# Altium PCB roneMotorBoard-v9.PcbDoc (part 2 of 2)
Units mil, origin at the board's own origin, x right, y up, seen from the top; angles counter-clockwise.
Board outline 3702 x 3936.38 mil, 2 copper layers (Top Layer, Bottom Layer); 104 components, 83 nets, 397 pads, 285 vias.
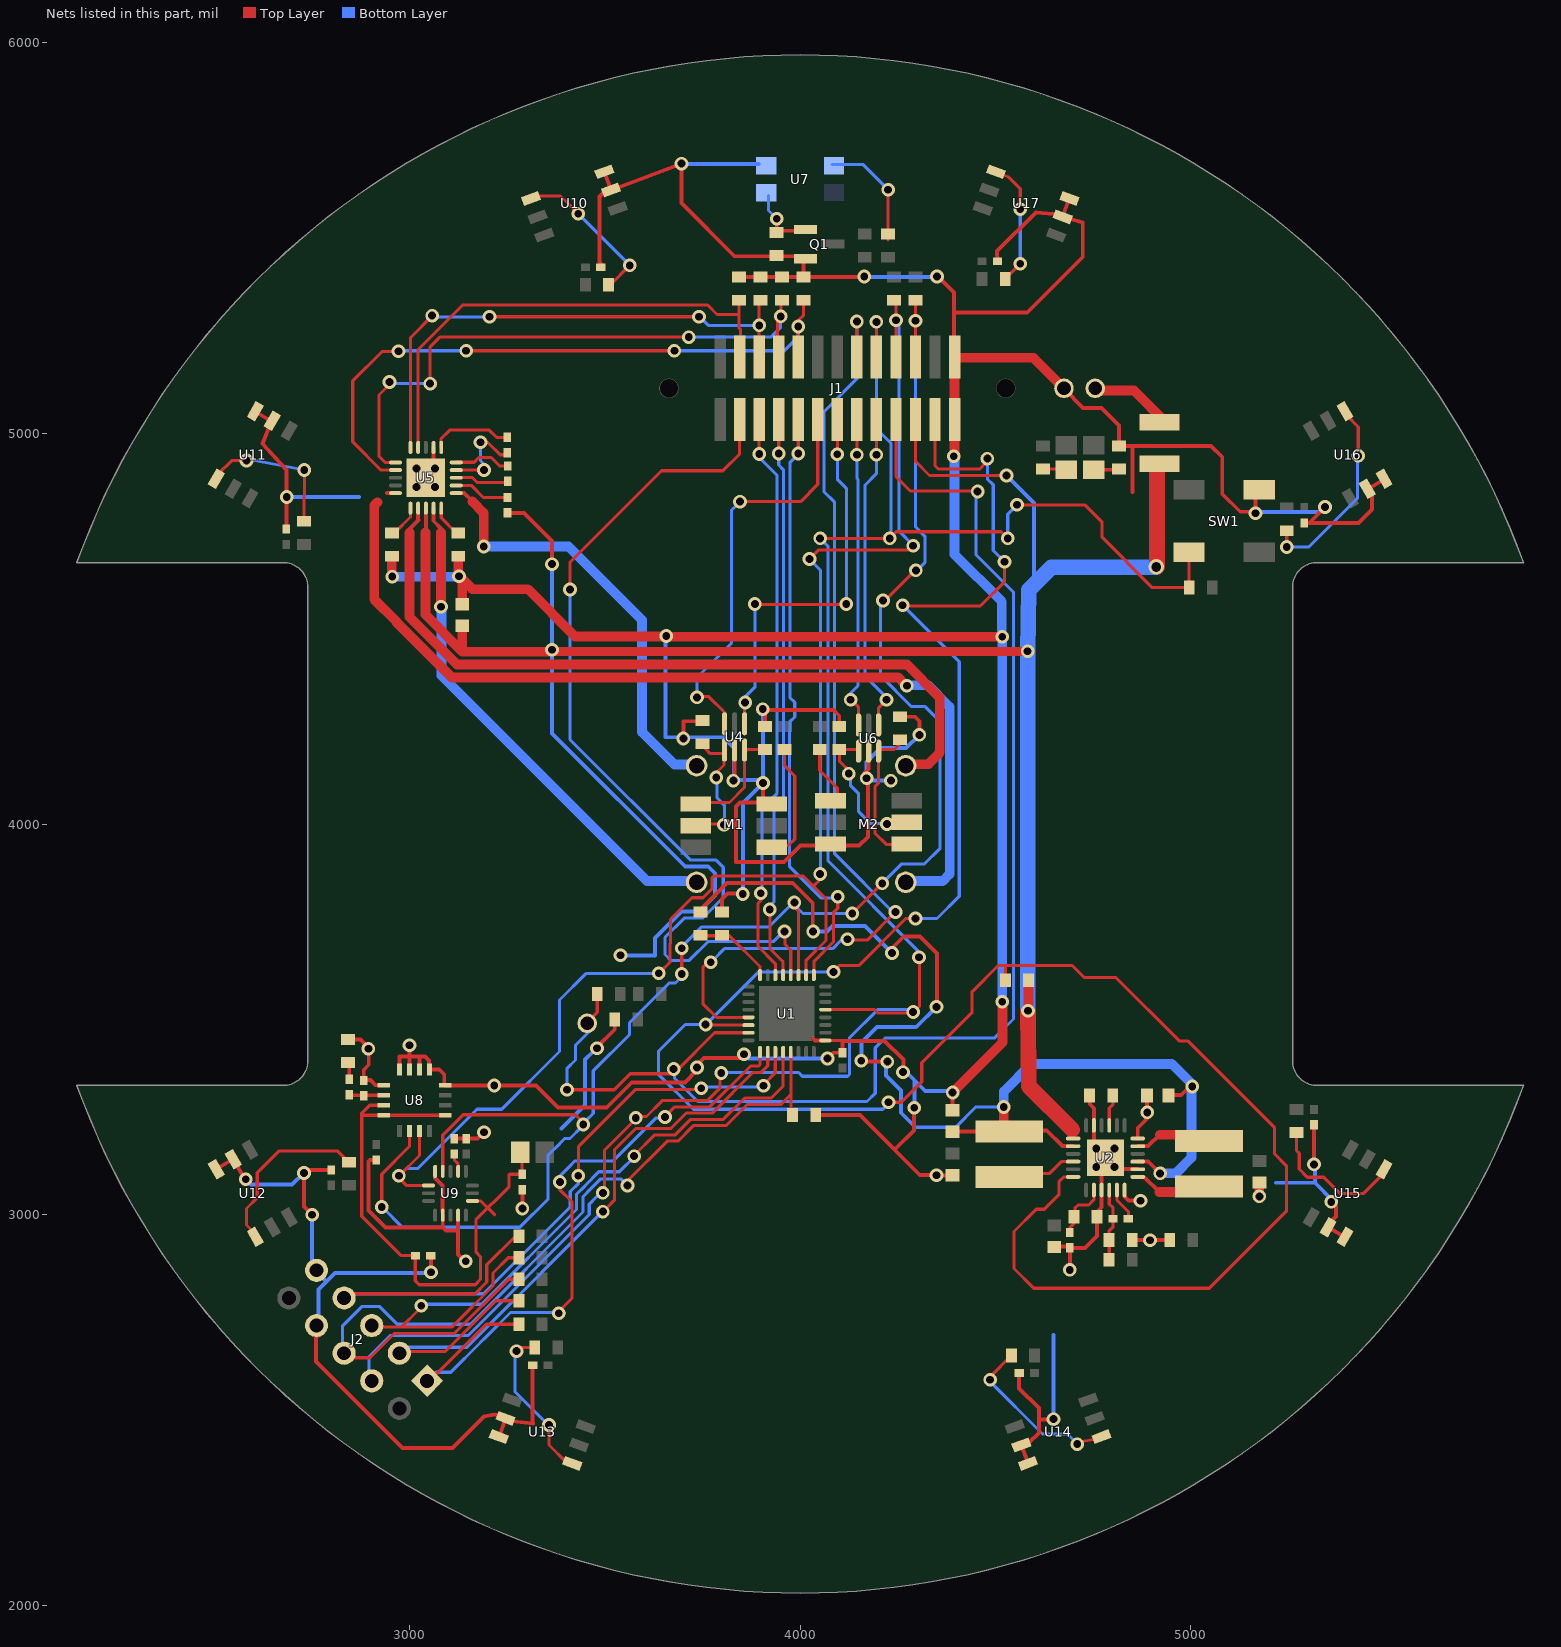
[diagram p2: the nets of this part, all layers, seen from the top]

## Via types
v1: diameter 35, hole 20, Top Layer to Bottom Layer, 252 vias
v2: diameter 25.98, hole 12.99, Top Layer to Bottom Layer, tented top, 9 vias
v3: diameter 35, hole 20, Top Layer to Bottom Layer, tented top, 8 vias
v4: diameter 89, hole 89, Top Layer to Bottom Layer, 8 vias
v5: diameter 140, hole 120, Top Layer to Bottom Layer, 4 vias
v6: diameter 175, hole 175, Top Layer to Bottom Layer, 2 vias
v7: diameter 40, hole 25, Top Layer to Bottom Layer, 1 vias
v8: diameter 915, hole 915, Top Layer to Bottom Layer, 1 vias

## Nets (pads, with @x,y where several pads share a name; then routed paths per layer and width w, separated by ;. In a path a pad name is that pad's centre, name@x,y a point inside that pad or via, vN(x,y) a via of type N, cw(c..) or ccw(c..) an arc to the next point about the centre after c; other vN are vias at no path point) (continued)
GND: C1.1 C2.1 C3.1 C4.1 C5.2 C6.2 C7.1 C13.1 C14.2 C16.1 C17.1 C18.1 C19.1 C20.1 C21.1 C22.1 C23.1 C24.1 C25.1 C26.1 C27.1 C28.1 J1.25 J1.26 J2.8 J2.9 J3.2 M1.K M2.K Q1.2 R10.1 R11.2 R13.1 R16.2 R17.1 R19.1 R20.2 R22.1 R23.1 R24.2 R25.2 R26.2 R27.2 R28.2 R29.2 R31.1 R34.2 R35.1 R44.1 R48.1 SW1.2 U1.1 U2.3 U2.6 U2.8 U2.12 U2.17 U2.25 U4.2 U5.2 U5.21 U6.2 U7.4 U8.8 U8.9 U8.10 U8.11 U8.12 U8.13 U9.5 U9.10 U9.12 U10.5 U10.6 U11.5 U11.6 U12.5 U12.6 U13.5 U13.6 U14.5 U14.6 U15.5 U15.6 U16.5 U16.6 U17.5 U17.6 | length 19313.7
  Top Layer w8: U1.1@4067.94,3446 4107,3446
  Top Layer w10: U12.6@2505.7,3116.6 2548.38,3142.62 U12.5@2549,3143 ; U12.5@2549,3141.6 2576,3096 v1(2581,3091) ; U11.6@2606,5055 U11.5@2647.91,5030.05 ; U11.5@2643.91,5023.05 2644,5023 2624,4973 2685,4906 v1@2685,4836 ; C20.1@2685,4754.69 v1@2685,4836 ; v1(2686,4837) v1@2685,4836 ; v1(2751,3000) 2730,3021 v1(2730,3107) 2738,3115 C21.1@2800,3115 ; J2.8@2767.16,2691.42 2761,2685.26 2761,2624 2982,2403 3110,2403 3191,2484 3217,2489 U13.5@3243,2483 ; R35.1@2843,3448.53 2874.47,3448.53 2885,3438 v1@2885,3425 ; C14.2@2883,3343.69 2883,3371 2896,3384 v1@2896,3423 ; C14.2@2883,3345 2900,3345 2913.61,3331.39 U8.13@2934.26,3331.39 ; v1@2883,3423 v1@2885,3425 ; v1(2895,3425) v1@2885,3425 ; C17.1@2915,3140.32 2898.68,3140.32 2895,3136.63 2895,3010.87 2938.87,2967 3085,2967 ; U8.12@2974.61,3371.74 2974.61,3405 3000.2,3405 ; U8.11@3000.2,3371.74 3000.2,3405 ; v1@3000.2,3425.2 3000.2,3405 ; U8.10@3025.8,3371.74 3025.8,3404.2 ; U8.9@3050,3370 3050,3395 3040,3405 3000.2,3405 ; U8.9@3051.39,3371.74 3076.26,3371.74 3089,3359 U8.8@3089,3331 ; v1@3055,2850 v1(3055,2853) C18.1@3055,2895 ; U5.21@3062,4906 U5.2@3062,4964.07 ; U9.5@3065.63,3111.1 3065.63,3094.37 3085,3075 U9.10@3085,3008 ; 3085.32,2968.68 U9.10@3085.32,2998.9 ; 3086,2968 3094,2960 3124.69,2960 ; U8.8@3091.35,3331 v1(3217,3331) 3304,3331 ; C28.1@3116,3194.68 C27.1@3145,3194.68 3174.68,3194.68 v1(3191,3211) ; U9.12@3124.69,2998.9 3124.69,2960 ; 3125,2960 3124.69,2960 ; v1@3139.67,2885.33 v1(3144,2881) v1@3145,2880 ; v1@3145,2878 3124.69,2898.31 3124.69,2960 ; U13.6@3231,2434 U13.5@3246.03,2479.2 ; U13.5@3251,2473 3316,2466 ; v1(3289,3016) C16.1@3289,3064.32 ; 3305,3331 3324,3331 3380,3275 3505,3275 3569,3339 3705,3339 v1@3736,3370 ; C22.1@3315.32,2615 3315.32,2467.68 3316,2467 ; v1@3477.5,3426.5 3525.47,3474.47 R44.1@3525.47,3500 ; C19.1@3496,5423 3496,5428 3486,5438 3486,5606 3502.2,5622.2 U10.5@3515.97,5622.2 ; U10.6@3498.87,5669.19 U10.5@3516,5623 ; U10.5@3526,5626 v1(3696,5690) 3696,5589 3832,5453 R34.2@3940,5453 ; v1(3701,4219) 3701,4263 R22.1@3745.47,4263 ; v1@3730.68,3364.48 3730.68,3378.68 3753.5,3401.5 v1@3846.5,3401.5 ; R19.1@3800,3774.53 3800,3808 3814,3822 v1@3851,3822 ; v1@3832,4127 U4.2@3832,4189.54 ; R25.2@3843.53,5399.53 R26.2@3898,5399.53 R27.2@3953,5399.53 R24.2@4008,5399.53 Q1.2@4008,5441 ; M1.K@3905,4055 M1.K@3905,4055.12 ; v1(3905,4105) M1.K@3905,4055.12 ; M1.K@3905.16,4055.12 M1.K@3905,4055.12 ; R20.2@3910,4250 v1@3910,4290 ; v1@3913.5,4292 4085,4292 4100,4277 R31.1@4100,4249.53 ; R34.2@3939,5454.47 3940.47,5453 3987,5453 Q1.2@3996,5444 ; R24.2@4008,5399.53 v1@4174.5,5399.5 ; 4033.12,3450.88 4037.9,3446.1 U1.1@4064.43,3446.1 ; R48.1@4039.53,3255 4152.96,3255 4181.96,3226 ; v1(4070,3400) 4084.68,3414.68 C1.1@4108,3414.68 4108,3444 ; M2.K@4094.84,3944.88 4150.88,3944.88 4173,3967 4173,4122 4165,4130 4175,4140 U6.2@4175,4186.54 ; M2.K@4096,3945 4000.87,3945 3958.87,3903 3836,3903 3836,4045 3846.12,4055.12 M1.K@3905,4055.12 ; 4107,3445 4108,3444 ; 4182,3226 4306,3102 v1@4348,3102 ; 4244,3169 4291,3216 v1@4291,3278 ; R23.1@4255,4274.53 4293.47,4274.53 4305,4263 v1(4305,4228) v1@4305,4226 ; v1@4266,3371 4264,3373 4264,3397 4216,3445 4108,3445 4108,3444 ; v1@4347,3101 v1(4349,3101) 4390,3101 C3.1@4390,3101.44 ; v1@4350,5404 4394,5360 4394,5309 ; C2.1@4390,3267.56 v1(4390,3313) ; J1.26@4394,5235 4394,5309 ; C26.1@4504.69,5440 4504,5466 4603,5565 U17.5@4663,5560 ; C23.1@4560.31,2595 4560.31,2555.68 4611,2505 4611,2476 ; U14.5@4566.03,2410.8 4580.47,2371.44 4581,2370 U14.6@4580,2368 ; U14.5@4573,2417 4586,2417 4611,2442 4611,2476 ; C6.2@4640,2918.44 C4.1@4690,2918.44 ; v1(4648,2477) 4647,2476 4611,2476 ; J3.2@4675,5114 4724,5065 4771,5065 4816,5020 R17.1@4816,4967.53 5051.47,4967.53 5080,4939 5080,4845 5126,4799 v1@5165,4799 ; U17.6@4687,5599 U17.5@4671.97,5553.8 4723,5539 4723,5451 4581,5309 4394,5309 ; v1@4690,2862 C4.1@4690,2915.32 ; C4.1@4690,2917.6 C4.1@4690,2915.32 ; R11.2@4741,3292 4741,3283 4751.47,3272.53 U2.17@4751.47,3228.68 ; U2.17@4751.47,3228.83 4751.47,3175.69 U2.25@4781,3146.16 ; R10.1@4759,3007 4771.16,3019.16 U2.3@4771.16,3063.32 ; R10.1@4760,2988 4760,2946 4729.31,2915.32 C4.1@4690,2915.32 ; U2.3@4771.16,3063.48 4771.16,3136.32 U2.25@4781,3146.16 ; U2.25@4810.53,3107.47 U2.25@4810.53,3116.63 ; U2.6@4830.21,3046.79 4840.21,3036.79 v1@4871,3036.79 ; R16.2@4849.53,2935 4889,2935 v1(4895,2935) R13.1@4945.47,2935 ; 4850,4849 4850,4967 ; U2.8@4863.68,3116.63 U2.25@4810.53,3116.63 ; U2.12@4863.68,3195.37 4863.68,3221.68 4888,3246 v1@4884,3250 ; v1@4887.44,3261.56 C5.2@4887.44,3315 ; v1(5165,4795) v1@5165,4799 ; SW1.2@5165,4846 v1@5165,4799 ; v1@5166,4799 v1@5165,4799 ; C25.1@5289,4771 5303,4771 v1(5343,4811) ; C25.1@5290,4770.31 5428.31,4770.31 5463,4805 5463,4847 U16.5@5460,4850 ; v1(5315,3129) C24.1@5315,3230.32 ; U15.5@5351,2968.4 U15.6@5394,2943 ; U15.5@5358,2983 5371,2996 5371,3021 v1@5362.5,3029.5 ; v1(5359,3033) v1@5362.5,3029.5 ; v1@5362,3029 v1@5362.5,3029.5 ; v1@5363,3030 v1@5362.5,3029.5 ; U16.5@5454,4858 U16.6@5493,4881 ; U2.25@4781,3146.16 U2.25@4810.53,3116.63
  Top Layer w25: v1@2955,4634 R28.2@2955,4685.47 ; v1@3125,4637 R29.2@3125,4685.47 ; v1@3127.5,4634.5 3161,4601 3303,4601 3424,4480 3657,4479.79 v1(4517,4479) ; C13.1@3135,4562.56 v1@3135,4625 ; v1(4390,3313) 4518,3441 v1@4518,3543 ; v1@4395,4942 J1.25@4395,5034.98 J1.26@4395,5195.02 ; J1.26@4397,5193 4597,5193 J3.2@4675,5115 ; v1(5175,3047) C7.1@5175,3082.44
  Bottom Layer w10: v1(2581,3091) 2595,3077 2700,3077 v1(2730,3107) ; v1(2686,4837) 2871,4837 ; v1(2751,3000) 2751,2866 2785,2832 ; J2.8@2767.16,2718 2767.16,2809.16 2809,2851 v1@3057,2851 ; v1@3135,2875 v1@3139,2875 ; v1@3139,2869 v1@3139,2875 ; v1@3141,2880 3145,2880 3140,2875 v1@3139,2875 ; v1@3143,2879 v1@3139,2875 ; 3389,3221 3449,3281 3449,3397 v1@3469,3417 ; v1@3655.47,4480.47 3655.47,4222 3803,4222 3830,4195 v1@3830,4113 ; v1@3698,5689 U7.4@3894,5689 ; v1@3837,4113 3892,4113 v1@3902.5,4102.5 ; v1@3854,3812 3854,4054 v1@3902.5,4102.5 ; v1@3869,3400 v1(4070,3400) ; v1@3905,4287 v1(3905,4105) v1@3902.5,4102.5 ; v1@4165,5400 v1@4353,5400 ; v1@4170,4119 4170,4159 4205,4194 4271,4194 v1(4305,4228) ; v1@4172,4127 4188,4111 4228,4111 v1@4232,4115 ; v1@4252.5,3372.5 4264.5,3372.5 4320,3317 v1@4381,3317 ; v1(4292,3274) 4292,3343 ; v1(4648,2477) 4648,2692 ; v1@5163,4798 5330,4798 v1(5343,4811) ; 5217,3082 5317,3082 ; v1@5317,3128 5317,3082 ; v1@5362.5,3036.5 5317,3082
  Bottom Layer w25: v1(2956,4633) v1@3127,4633 ; v1@4395,4929 4395,4690 4516,4569 v1@4516,4496 ; v1@4517,3553 v1(4517,4479) v1@4517,4483
  other v1: 4690,2859 4871,3036 4888,3262 4263,3365 3736,3377 3856,3411 3480,3426 3000,3434 4517,3545 3853,3821 3829,4111 4232,4111 4170,4117 3904,4294 3657,4481 3127,4634 4393,4941 4164,5401 4350,5401
  other v3: 4757.38,3122.38 4804.62,3122.38 4757.38,3169.62 4804.62,3169.62 3018.38,4862.38 3065.62,4862.38 3018.38,4909.62 3065.62,4909.62
I2C_SCL: J1.22 R1.1 U1.11 U8.2 U9.4 | length 4565.7
  Top Layer w8: v1@2929,3034 2929,3104 3000.2,3175.2 U8.2@3000.2,3214.26 ; U9.4@3085.32,3111.1 3085.32,3203.62 3137.69,3256 3425,3256 v1@3449,3232 ; v1@3697,3619 v1@3697,3673 ; v1@3976,3796 3995.53,3776.47 U1.11@3995.53,3613.43 ; v1(4133,3771) v1(4210,3848) ; v1@4220,4575 v1@4292,4647 ; v1@4288,4648 v1@4298,4648 ; J1.22@4295,5195.02 v1(4295,5288) v1@4295,5293 ; R1.1@4295,5336 v1@4295,5293 ; v1@4308,5293 v1@4295,5293
  Bottom Layer w8: v1@2931,3019 2982,2968 3282.72,2968 3355,3040.28 3355,3153 3371.22,3169.22 3371.5,3169.22 3397.28,3195 3411,3195 3440.87,3224.87 3447.87,3224.87 v1@3453.64,3230.64 ; v1@3450,3239 3470.31,3259.31 3470.31,3368.31 3563,3461 3563,3467 ; 3563,3468.08 3563,3491 3665,3593 3681,3593 v1@3699,3611 ; v1@3692,3681 3747,3736 3919,3736 v1@3979.5,3796.5 ; v1@3981,3797 4007,3771 v1(4133,3771) ; v1@4205,4559 4205,4380.28 4284.95,4300.33 4319.67,4300.33 4358,4262 4358,3938 4318,3898 4260,3898 v1(4210,3848) ; v1(4295,5288) 4295,4760.5 4319,4736.5 4319,4669 v1@4298,4648
  other v1: 2929,3020 3445,3231 3697,3616 3697,3682 3985,3799 4212,4572 4296,4649
I2C_SDA: J1.20 R2.1 U1.10 U8.3 U9.6 | length 3868.5
  Top Layer w8: v1@2972,3096 2993.31,3074.69 U9.6@3048.9,3074.69 ; v1@2973.5,3099.5 3025.8,3151.8 U8.3@3025.8,3214.26 ; v1@3636,3619 3639,3619 3667,3647 3667,3693.96 3668,3694.96 3668,3756 3723.23,3811.23 3751.24,3811.23 3774.41,3834.4 3774.41,3862.41 3779,3867 4008,3867 4066,3809 4066,3702 4015.21,3651.21 U1.10@4015.21,3613.43 ; v1(4024,4678) 4047.5,4701.5 v1@4278.5,4701.5 ; 4035,3842 v1@4047.94,3854.94 ; J1.20@4245,5195.02 v1(4245,5289) R2.1@4245,5338
  Bottom Layer w8: v1(2973,3100) 2991.5,3118.5 3021.5,3118.5 3173,3270 3236,3270 3384,3418 3384,3549.63 3451.37,3617 v1@3638,3617 ; v1(4024,4678) 4024,4677 4052,4649 4052,3885.44 v1@4043,3876.44 ; v1@4244,5288 4253,5279 4253,4748.72 4289,4712.72 v1(4289,4712)
  other v1: 3638,3618 4051,3872
JTAG_BOTTOM_TCK: J2.1 R8.1 U1.25 | length 1800.5
  Top Layer w8: J2.1@3042,2565 3197,2720 R8.1@3280.47,2720 ; v1@3385,3085 v1(3385,3084) 3385,3064 3416,3033 3416,2786 3388,2758 v1@3397,2749 ; v1@3653,3250 3653.12,3250 3679.12,3276 3768.37,3276 3872.75,3380.37 3893.37,3380.37 3897.1,3384.1 U1.25@3897.1,3416.57
  Bottom Layer w8: J2.1@3039,2567 J2.1@3074,2567 ; J2.1@3047,2576 3068,2597 3105.63,2597 3180.5,2671.87 3180.5,2672.22 3197.78,2689.5 3198.13,2689.5 3258.63,2750 3389,2750 3390,2749 v1@3397,2749 ; v1@3384.5,3085.5 3384.5,3098.5 3415,3129 ; 3413.22,3127.5 3423.72,3138 3521.28,3138 3631.28,3248 v1@3650,3248 ; v1@3654,3249 v1(3654,3250)
  other v1: 3382,2748
JTAG_BOTTOM_TDI: J2.7 R6.1 U1.27 | length 2000.3
  Top Layer w8: J2.7@2831,2778 2851,2798 3168,2798 3198,2828 3198,2872 R6.1@3273,2947 ; v1@3441,3107 3433,3115 3433,3175 3579,3321 3748,3321 v1@3753,3326 ; v1@3909,3336 3936.24,3363.01 U1.27@3936.47,3416.57
  Bottom Layer w8: J2.7@2826,2774 2850,2798 3189.49,2798 3411.5,3020.01 3411.5,3059.5 3433,3081 3433,3087 v1@3427,3093 ; v1@3758,3327 v1@3903,3327
  other v1: 3432,3100 3747,3324 3906,3330
JTAG_BOTTOM_TDO: J2.5 R5.1 U1.28 | length 1819.5
  Top Layer w8: J2.5@2905,2713 3109.25,2713 3214,2817.75 3214,2851 3253,2890 R5.1@3280.47,2890 ; 2980.5,2713.5 3022,2755 3022,2774 v1@3034,2774 ; v1@3574.5,3151.5 3627.5,3204.5 3680.5,3204.5 3720,3244 3803.37,3244 3858.37,3299 3926,3299 3956,3329 U1.28@3956,3413
  Bottom Layer w8: v1@3034,2774 3037,2771 3185.12,2771 3427.5,3013.38 3427.5,3052.5 3449.5,3074.5 3449.5,3074.85 3484.65,3110 3537,3110 3575,3148 v1@3575,3149
  other v1: 3030,2767 3575,3150
JTAG_BOTTOM_TEST: J2.6 R7.1 R48.2 U1.29 | length 2219.7
  Top Layer w8: J2.6@2829,2634 2899,2634 2961,2696 3114.88,2696 3253.88,2835 R7.1@3280.47,2835 ; v1@3558,3087 3659.5,3188.5 3687.13,3188.5 3726.63,3228 3810,3228 3864,3282 3951,3282 ; 3951.17,3282.83 3976,3307.65 ; R48.2@3976,3258 3976,3307.65 ; U1.29@3976,3412 3976,3307.65
  Bottom Layer w8: J2.6@2829,2645.71 2829,2716 2878,2765 2924,2765 2969,2720 3156.75,2720 3444,3007.25 3444,3046.37 3465.5,3067.87 ; 3465.5,3068.22 3489.28,3092 3541,3092 v1(3558,3075)
JTAG_BOTTOM_TMS: J2.3 R4.1 U1.26 | length 1718.3
  Top Layer w8: J2.3@2985,2648 2987,2650 3091.51,2650 3221.51,2780 R4.1@3280.47,2780 ; v1@3499.5,3011.5 3499.5,3017.5 3504.5,3017.5 3525,3038 3525,3167 3578.5,3220.5 3668.13,3220.5 3707.63,3260 3775,3260 3879.37,3364.37 3900,3364.37 3916.79,3381.16 U1.26@3916.79,3416.57
  Bottom Layer w8: J2.3@2969,2632 2998,2661 3147,2661 3164.5,2678.5 3164.5,2678.85 3191.15,2705.5 3191.5,2705.5 3339.5,2853.5 3339.5,2854.13 3488.37,3003 v1@3498,3003
  other v1: 3495,3008
LED_IR_BEACON: J1.16 U1.21 | length 2498.6
  Top Layer w8: v1@3769,3641 3759,3641 3751,3633 3751,3540 3786,3505 U1.21@3865,3505 ; v1@4108.5,3703.5 4172.5,3703.5 v1(4244,3775) ; J1.16@4145,5195.02 v1(4145,5286)
  Bottom Layer w8: v1@3778,3642 3778,3653 3806,3681 4083,3681 4104,3702 v1@4122,3702 ; v1(4145,5286) 4145,5139 4061,5055 4061,4850 4088,4823 4088,3924 v1@4241,3771
  other v1: 3771,3646 4121,3705
MOT0_CUR: R29.1 U5.15 | length 77.7
  Top Layer w8: U5.15@3081.37,4808.24 3081.37,4783.37 R29.1@3118.74,4746
MOT0_PWMA: J1.4 R25.1 U5.4 | length 1255.7
  Top Layer w8: U5.4@3022.32,4963.76 3022.32,5214.31 3136,5328 3763,5328 3787,5304 3843,5304 ; R25.1@3840,5338 3843,5335 3843,5304 ; J1.4@3842,5202.26 ccw(c3852.24,5202.26) J1.4@3845,5195.02 ; J1.4@3847,5243 3847,5266 3843,5270 3843,5304 ; J1.4@3843,5199.85 ccw(c3849.83,5199.85) J1.4@3845,5195.02 ; J1.4@3843,5199.85 ccw(c3849.83,5199.85) J1.4@3845,5195.02 ; J1.4@3843,5199.85 ccw(c3849.83,5199.85) J1.4@3845,5195.02 ; J1.4@3843,5199.85 ccw(c3849.83,5199.85) J1.4@3845,5195.02
MOT0_PWMB: J1.6 R26.1 U5.5 | length 1351.9
  Top Layer w8: U5.5@3002.63,4963.76 3002.63,5022.37 ; 3003,5022 3003,5218 3003,5245 v1@3060,5302 ; v1(3205,5298) v1(3741,5298) ; J1.6@3895,5195.02 v1(3895,5276) R26.1@3895,5339
  Bottom Layer w8: v1@3061,5297 3204,5297 v1(3205,5298) ; v1(3741,5298) 3743,5298 3765,5276 v1(3895,5276) v1@3893.5,5274.5
  other v1: 3058,5301
MOT1_A: M2.M2 U5.10 | length 2382.2
  Top Layer w10: 2941.94,4846.94 U5.10@2963.56,4846.94
  Top Layer w25: 2918.5,4823.5 2910,4815 2910,4575 2967,4518 ; 2967,4516.33 3108.33,4375 4251,4375 v1@4266,4360
  Bottom Layer w25: v1@4275,4355 4327,4355 4382.5,4299.5 4382.5,3871.5 4365,3854 M2.M2@4284,3854
  other v1: 4273,4354
MOT1_B: M2.M1 U5.12 | length 1965.1
  Top Layer w10: 3001,4746 3001,4756 3022.97,4777.98 ; 3022,4778 U5.12@3022,4807.24
  Top Layer w25: 3001,4746 3000,4745 3000,4530 3122,4408 4273,4408 4357,4324 4357,4184 4355,4182 4355,4180 4328,4153 M2.M1@4275,4153
MOT1_CUR: R28.1 U5.11 | length 78.8
  Top Layer w8: R28.1@2965.03,4745 2965.03,4748.03 3002.63,4785.63 U5.11@3002.63,4808.24
MOT1_PWMA: J1.8 R27.1 U5.6 | length 1520.2
  Top Layer w8: v1@2945,5121 2922,5098 2922,4941 2937.63,4925.37 U5.6@2964.24,4925.37 ; v1(3053,5127) 3053,5221 3078,5246 v1(3715,5246) ; v1@3942,5289 3942,5198.02 ccw(c3945,5198.02) J1.8@3945,5195.02 cw(c3945,5197.02) J1.8@3943,5197.02 ; v1(3950,5299) 3951,5298 R27.1@3951,5341
  Bottom Layer w8: v1@2954,5127 v1(3053,5127) ; v1(3715,5246) 3925,5246 3950,5271 v1(3950,5299)
  other v1: 2949,5131
MOT1_PWMB: J1.10 R24.1 U5.7 | length 1631.8
  Top Layer w8: U5.7@2964.24,4905.69 2927.32,4905.69 2855,4978 2855,5134 2930,5209 v1@2975,5209 ; v1(3145,5211) v1(3678,5211) ; J1.10@3995,5195.02 v1@3995,5263 ; v1(3995,5273) v1@4005,5273 ; 3998,5291 4008,5301 R24.1@4008,5340.47
  Bottom Layer w8: v1@2982,5211 v1(3145,5211) ; v1(3678,5211) 3959,5211 3995,5247 v1(3995,5273)
  other v1: 2972,5210
MOT_0A: M1.M2 U5.16 | length 1121.7
  Top Layer w10: U5.16@3119.07,4846.94 3140.06,4846.94 3161,4826
  Top Layer w25: 3161,4826 3161,4825 3190,4796 v1(3190,4710)
  Bottom Layer w25: v1(3190,4710) 3406.74,4710 3595,4521.74 3595,4235 3678,4152 M1.M2@3734,4152
MOT_0B: M1.M1 U5.14 | length 1269.9
  Top Layer w10: 3061,4776 3081,4756 ; 3062,4776 U5.14@3062,4808.56
  Top Layer w25: v1(3081,4556) 3081,4746
  Bottom Layer w25: v1@3082,4557 3082,4380 3608,3854 3706.19,3854
NetC4_2: C4.2 R10.2 U2.2 | length 143.4
  Top Layer w8: C4.2@4690,2954.69 4690,2967 4700,2977 R10.2@4700,2994 ; R10.2@4700.47,2995 R10.2@4701.17,2995 ; R10.2@4703,3000 4703,3017 4711,3025 4738,3025 4751.47,3038.47 U2.2@4751.47,3063.32
NetC8_1: C8.1 R14.2 R16.1 U2.4 | length 205.2
  Top Layer w8: R16.1@4790,2941 4790,2958 4800,2968 4800,3019 4791,3027 U2.4@4791,3056 ; U2.4@4790.84,3063.48 4791,3063.32 U2.4@4791,3048.99 ; R14.2@4791,2871 4791,2937 R16.1@4792,2938
NetC8_2: C8.2 U2.5 | length 80.5
  Top Layer w8: U2.5@4810.53,3063.32 4810.53,3037.47 4840,3008 C8.2@4840,2995
NetC10_1: C10.1 U5.19 | length 230.2
  Top Layer w8: U5.19@3119.07,4906 v1(3191,4906) ; v1(3182,4977) 3201,4976 3232,4945 3251.69,4945 C10.1@3253,4946.31
  Bottom Layer w8: v1@3184,4913 v1(3191,4906) ; v1@3184,4975 v1(3182,4977) 3182,4930 v1@3192,4920
NetC10_2: C10.2 U5.1 | length 211.4
  Top Layer w8: U5.1@3080.68,4964.07 3080.68,4985.68 3103,5008 3204.25,5008 3223.25,4989 3248.69,4989 C10.2@3252,4985.69
NetC11_1: C11.1 U5.18 | length 138.2
  Top Layer w8: U5.18@3119.07,4886.31 3161.31,4886.31 3173.63,4874 3248.06,4874 C11.1@3251,4876.94
NetC11_2: C11.2 U5.20 | length 146.3
  Top Layer w8: U5.20@3119.07,4925.68 3165.43,4925.68 3177.75,4938 3209,4938 3230.69,4916.31 C11.2@3251.31,4916.31
NetC12_2: C12.2 U5.17 | length 144.7
  Top Layer w8: U5.17@3119.07,4866.63 3158.37,4866.63 3189.31,4835.69 C12.2@3251,4835.69
NetC15_2: C15.2 R35.2 | length 42.3
  Top Layer w8: C15.2@2846,3346.69 R35.2@2846,3389
NetC28_2: C28.2 U9.2 | length 48.9
  Top Layer w8: C28.2@3115,3156 3115,3140 3124.69,3130.31 U9.2@3124.69,3111.1
NetD1_2: D1.2 R12.2 | length 50.5
  Top Layer w8: R12.2@4621,4908.47 D1.2@4671.53,4908.47
NetD2_2: D2.2 R17.2 | length 60.5
  Top Layer w8: D2.2@4751,4906.5 R17.2@4811.5,4906.5
NetJ3_1: J3.1 R9.2 | length 197.5
  Top Layer w25: J3.1@4771,5109 4854.15,5109 R9.2@4935,5028.15
NetL1_1: L1.1 U2.22 | length 188
  Top Layer w8: L1.1@4521,3097.75 4529.25,3106 4638.37,3106 4668.37,3136 U2.22@4693.11,3136
NetL2_1: L2.1 U2.7 | length 211.7
  Top Layer w10: U2.7@4863.68,3096.94 4880.06,3096.94 4919,3058 ; L2.1@5031.09,3058 L2.1@5051,3077.91
  Top Layer w25: 4919,3058 L2.1@5031.09,3058
NetL2_2: L2.2 U2.11 | length 158.2
  Top Layer w10: U2.11@4863.68,3175.53 4890,3175.53 ; 4890,3176 4920.91,3205 ; L2.2@5039.41,3206 L2.2@5051,3194.41
  Top Layer w25: 4920.91,3205 L2.2@4994,3205
NetM1_A: M1.A R21.1 | length 326.9
  Top Layer w8: M1.A@3906,3945 3970,3945 3986,3961 3986,4123 3960,4149 R21.1@3960,4190.47
NetM2_A: M2.A R30.1 | length 155.1
  Top Layer w8: R30.1@4050,4190.47 4050,4137 4095,4092 M2.A@4095,4054
NetQ1_1: Q1.1 R34.1 U7.3 | length 179.7
  Top Layer w8: R34.1@3940,5512 v1(3940,5549) ; R34.1@3940,5518 4010.17,5518 Q1.1@4013.57,5521.4
  Bottom Layer w8: U7.3@3919,5608 3919,5570 v1(3940,5549)
NetR11_1: R11.1 U2.15 | length 83.8
  Top Layer w8: U2.15@4790.84,3228.83 4790.84,3265.84 4790.84,3272.84 4800,3282 4800,3306 R11.1@4802,3308
NetR32_2: R32.2 U7.1 | length 299.4
  Top Layer w8: 4225,5494.53 v1(4225,5623)
  Bottom Layer w8: U7.1@4081,5688 4160,5688 v1(4225,5623)
NetR36_1: R36.1 U10.1 | length 392.3
  Top Layer w8: U10.1@3323,5607 3386.47,5607 v1(3432,5561.47) v1@3426.47,5567 ; R36.1@3514.53,5380 v1(3564,5429.47)
  Bottom Layer w8: v1(3432,5561.47) v1(3564,5429.47)
NetR37_1: R37.1 U11.1 | length 378.9
  Top Layer w8: U11.1@2511,4896 2545,4930 v1(2583,4930) ; R37.1@2726.03,4778.5 R37.1@2730,4774.53 v1(2731,4906)
  Bottom Layer w8: v1@2580,4935 2579,4935 2579.96,4934.82 2583.78,4934.09 v1(2731,4906)
NetR38_1: R38.1 U12.1 | length 443.9
  Top Layer w8: U12.1@2604,2953 2583,2974 2583,3016 2610.5,3043.5 2610.5,3107.5 2666,3163 2816.53,3163 R38.1@2845,3134.53
NetR39_1: R39.1 U13.1 | length 403
  Top Layer w8: v1@3275,2651 3284,2660 R39.1@3320.47,2660 ; R39.1@3320,2660 R39.1@3320.47,2660 ; R39.1@3325,2660 R39.1@3320.47,2660 ; v1(3357,2462) 3357,2411 3401,2367 U13.1@3417,2367
  Bottom Layer w8: v1@3270,2645 3270,2547 v1@3356,2461
  other v1: 3274,2651
NetR40_1: R40.1 U14.1 | length 436.9
  Top Layer w8: v1(4486,2578) 4486,2585.53 R40.1@4540.47,2640 ; v1@4711,2418 U14.1@4770,2427
  Bottom Layer w8: v1@4484,2574 4485,2574 4620,2439 4684,2439 v1@4710,2413
  other v1: 4709,2413
NetR41_1: R41.1 U15.1 | length 371.8
  Top Layer w8: R41.1@5278,3202.47 R41.1@5270,3210.47 5270,3164 5277,3157 5277,3117 5298,3096 5340,3096 5382,3054 5441,3054 5487,3100 U15.1@5487,3109
NetR42_1: R42.1 U16.1 | length 500.8
  Top Layer w8: v1@5245,4710 R42.1@5245,4750.47 ; U16.1@5397,5047 5428,5016 v1(5428,4942)
  Bottom Layer w8: v1(5245,4709) 5301.47,4709 5426,4833.53 5426,4942 v1@5427,4943
NetR43_1: R43.1 U17.1 | length 308
  Top Layer w8: U17.1@4503,5668 4534,5655 4563,5626 v1(4563,5573) ; R43.1@4524.53,5395 v1(4563,5433.47)
  Bottom Layer w8: v1@4563,5447 v1(4563,5573)
PLLFILT: C14.1 C15.1 U8.14 | length 88.3
  Top Layer w8: C15.1@2846,3305.8 U8.14@2934.26,3305.8
POWER_BUTTON: J1.19 R45.1 TP1.1 U1.23 | length 3589
  Top Layer w8: v1@3415,3320 3524,3320 3565,3361 v1@3682,3361 ; TP1.1@3459,3497 3480.47,3518.47 R45.1@3480.47,3565 ; v1@3685,3370 3780.79,3465.79 U1.23@3867.57,3465.79 ; J1.19@4245,5034.98 4245,4889 4282,4852 v1@4452,4852
  Bottom Layer w8: v1@3403,3318 3403,3374 3425,3396 3425,3434 3460,3469 TP1.1@3460,3486 ; v1@3678,3370 3678,3350 3738,3290 4171,3290 4192,3311 4192,3427 4217,3452 4497,3452 4546,3501 4546,4593 4450,4689 v1@4450,4839
  other v1: 3403,3320 3676,3373 4454,4851
POWER_EN: J1.23 R15.1 U1.22 U2.24 | length 6189
  Top Layer w8: v1@3762,3485.47 U1.22@3867.57,3485.47 ; v1(4085,3621.5) 4085,3623 4099.5,3637.5 4149.5,3637.5 4270,3758 v1(4295,3758) ; v1@4221,3285 4227,3285 v1@4227,3287 ; v1@4230,3288 4259,3288 4311,3340 4311,3389 4440,3518 4440,3571 4507,3638 4696,3638 4726.75,3607.25 4807.75,3607.25 4970,3445 4991.37,3445 5214,3222.37 5214,3155.37 5244,3125.37 5244,3008.96 5102.04,2867 ; v1@4262,4558 4461,4558 4523,4620 v1(4523,4671) ; J1.23@4345,5034.98 4345,4917 4354,4908 4459,4908 4479,4928 v1(4479,4935) ; R15.1@4525.47,3600 4525.47,3635.47 ; U2.24@4698.32,3096.79 4674.47,3096.79 4662,3084.31 4662,3051.37 4624.63,3014 4603.63,3014 4547,2957.37 4547,2862.63 4597.63,2812 5047,2812 5102,2867
  Bottom Layer w8: v1@3761,3489 3893.5,3621.5 v1(4085,3621.5) ; v1@3766,3487 v1(3758,3487) 3706,3487 3637,3418 3637,3360 3727,3270 4074,3270 ; 4075,3270 4211,3270 v1@4230,3289 ; v1(4262,4560) 4407,4415 4407,3815 4350,3758 v1(4295,3758) ; v1(4479,4935) 4479,4883 4494,4868 4494,4700 v1(4523,4671)
  other v1: 4226,3288
QEI_0A: J1.11 U4.6 | length 1046
  Top Layer w8: v1@3738,4326 3766,4326 3806.41,4285.59 U4.6@3806.41,4256.46 ; v1(3846,4825) 4001,4825 4045,4869 J1.11@4045,5034.98
  Bottom Layer w8: v1@3736,4322 v1(3736,4324) 3736,4375 3824,4463 3824,4803 v1(3846,4825)
QEI_0A_ANALOG: M1.E1 R22.2 U4.1 | length 344
  Top Layer w8: M1.E1@3708.31,4000 v1@3810,4000 ; R22.2@3755,4195 3770,4180 3805,4180 3805,4151 v1@3779,4125
  Bottom Layer w8: v1@3781,4114 3787,4108 3787,4067 3806,4048 v1@3806,4004
  other v1: 3805,3998 3785,4119
QEI_0B: J1.13 U4.4 | length 1051.3
  Top Layer w8: U4.4@3857.59,4256.46 v1@3857.59,4323.41 ; v1@3895,4562 v1@4129,4562 ; v1(4095,4946) J1.13@4095,5030
  Bottom Layer w8: v1@3857,4306 3857,4323 3884,4350 3884,4556 v1@3889,4561 ; v1(4095,4946) 4095,4882 4118,4859 4118,4573 v1@4129,4562
  other v1: 3859,4311 3884,4563 4118,4563
QEI_0B_ANALOG: M1.E2 R20.1 U4.3 | length 304.7
  Top Layer w8: M1.E2@3710,4055 3819,4055 3857.59,4093.59 U4.3@3857.59,4189.54 ; 3865,4190 3865.47,4190.47 R20.1@3910,4190.47
QEI_1A: J1.15 U6.6 | length 802.7
  Top Layer w8: v1(4129,4318) 4129,4319 4149.41,4298.59 U6.6@4149.41,4253.46 ; v1(4145,4945) J1.15@4145,5030
  Bottom Layer w8: v1(4129,4318) 4129,4319 4121,4327 4148,4354 4148,4882 4145,4885 v1(4145,4945)
QEI_1A_ANALOG: M2.E1 R31.2 U6.1 | length 374.3
  Top Layer w8: R31.2@4100,4190.47 U6.1@4148.53,4190.47 ; R31.2@4101,4188 4101,4160 4129,4132 v1@4129,4128 ; v1(4222,4000) M2.E1@4285,4000
  Bottom Layer w8: v1@4129,4128 4129,4098 4149.41,4077.59 4149.41,4031.59 4180,4001 v1@4223,4001
  other v1: 4124,4129
QEI_1B: J1.17 U6.4 | length 862.4
  Top Layer w8: v1(4195,4945) J1.17@4195,5032 ; U6.4@4200.59,4253.46 4200.59,4297.59 v1(4221,4318) ; v1(4221,4318) 4228,4325 4228,4328 4221,4321 v1(4221,4318)
  Bottom Layer w8: v1(4195,4945) 4195,4896.63 4166,4867.63 4166,4378 4216,4328 v1@4230,4328 ; v1(4221,4318) 4221,4321 v1@4228,4328
QEI_1B_ANALOG: M2.E2 R23.2 U6.3 | length 390.9
  Top Layer w8: 4200,4104 4191,4095 4191,3977 4220,3948 M2.E2@4293,3948 ; U6.3@4200,4190.47 4240.47,4190.47 R23.2@4258,4208 ; 4200.59,4105.59 U6.3@4200.59,4186.54
RESET: J1.18 J2.4 R47.1 SW1.3 U1.5 | length 5417.4
  Top Layer w8: v1@3492,3055 3499,3062 3499,3165 3585.5,3251.5 3606.5,3251.5 3647,3292 3761.75,3292 3795,3325.25 v1@3795,3360 ; v1(4051,4731) v1(4229,4731) ; U1.5@4064.43,3524.84 4190.16,3524.84 4199,3516 v1@4288,3516 ; J1.18@4195,5195.02 v1(4195,5285) ; v1@4233,4736 4245,4748 4514,4748 v1(4531,4731) ; v1@4290,3528 4300,3528 4305,3533 4305,3658 v1(4304,3659) ; v1(4555,4817) 4555,4816 4729,4816 4772.5,4772.5 4772.5,4733.5 4901,4605 R47.1@4995.47,4605 ; R47.1@4995,4607 SW1.3@4995,4695
  Bottom Layer w8: J2.4@2897,2565 2897,2607 ; 2897,2608 2897,2607 ; v1@3491,3056 3491,3047 3480,3047 3460,3027 3460,3000.63 3150.37,2691 2951,2691 2897,2637 2897,2607 ; v1@3794,3364 3996,3364 4005.5,3354.5 4121.5,3354.5 4126,3359 4126,3453 4198,3525 v1@4276,3525 ; v1(4051,4731) 4071,4711 4071,3906 4301,3676 v1@4301,3655 ; v1(4195,5285) 4195,5012 4232,4975 4232,4734 v1(4229,4731) ; v1(4531,4731) 4531,4793 v1(4555,4817)
  other v1: 3495,3056 3579,3248 3798,3363 4289,3519
SPI_CLK: J1.9 U1.9 | length 1552.8
  Top Layer w8: v1(3995,4948) J1.9@3995,5034.98 ; U1.9@4034.9,3613.43 4034.9,3647.9 4085,3698 4085,3773 4096,3784 v1@4096,3811
  Bottom Layer w8: 3973,4236.56 3973,3891 4053,3811 v1@4106,3811 ; 3974,4236.28 3973.5,4236.78 3973.5,4261.22 3986,4273.72 3986,4311.28 3973.5,4323.78 3973.5,4924.5 3995,4946 v1(3995,4948)
  other v1: 4096,3814
SPI_MISO: J1.5 U1.14 | length 1470.3
  Top Layer w8: 3892,3796.81 3892,3687 3936.47,3642.53 U1.14@3936.47,3613.43 U1.14@3936.47,3610 ; 3892,3797 3899,3804 v1(3899,3823) ; v1(3895,4947) J1.5@3895,5034.98
  Bottom Layer w8: v1@3895,4938 3941,4892 3941,4079 3902,4040 v1@3902,3825
SPI_MOSI: J1.7 U1.13 | length 1460.1
  Top Layer w8: v1@3923,3787 3923,3680.25 3952.13,3651.13 ; v1(3945,4948) J1.7@3945,5034.98 ; 3952.63,3650.63 3952.13,3651.13 ; U1.13@3956.16,3610 U1.13@3956.16,3613.43 3956.16,3647.1 3952.13,3651.13
  Bottom Layer w8: v1@3919,3787 3933,3801 3933,4034 3957,4058 3957,4906.63 3945,4918.63 v1(3945,4948)
  other v1: 3922,3781
SPI_SEL_MSP430: J1.3 U1.12 | length 2381.2
  Top Layer w8: v1(3411,4600) 3411,4670 3645,4904 3802,4904 3845,4947 J1.3@3845,5034.98 ; v1@3961,3721 3961,3692 3974,3679 ; 3975,3678 3974,3679 ; U1.12@3975.84,3613.43 3975.84,3677.16 3974,3679
  Bottom Layer w8: v1(3411,4600) 3411,4216 3718.65,3908.35 3783.65,3908.35 3803,3889 3803,3812 3750,3759 3703,3759 3654,3710 3654,3666 3669,3651 3716,3651 3764,3699 3931,3699 v1@3954,3722
  other v1: 3960,3725
VBAT: C12.1 C13.2 J1.21 R9.1 R15.2 U2.19 U5.13 | length 6278.7
  Top Layer w8: J1.21@4295,5034.98 4295,4928 4331,4892 v1(4528,4892) ; 4914,4754 4914,4780
  Top Layer w10: 3042,4749 U5.13@3042,4808.24 U5.13@3042,4809 ; C12.1@3251,4796 3293,4796 3365,4724 v1(3365,4665) ; 4904.47,4764.53 4909,4760
  Top Layer w25: 3041,4746 3041,4536 3135,4442 C13.2@3135,4507.44 ; 3136,4441 v1@3365,4441 ; v1@3366,4441 v1(4582,4442) ; v1@4584,3518 R15.2@4584,3595.53
  Top Layer w40: v1@4582.99,3519 4583,3517.99 4585,3329 4696,3218 ; v7@4913,4658 R9.1@4913,4906
  Bottom Layer w10: v1(3365,4665) v1(3365,4446) 3365,4232 3705.92,3891.08 3706.19,3891.35 3764.65,3891.35 3782,3874 3782,3817 3741,3776 3695.96,3776 3630,3710.04 ; v1(3540,3664) 3628,3664 3628,3708 3630,3710 ; v1(4528,4892) 4533,4886.96 4598,4821.96 4598,4628
  Bottom Layer w40: v1@4582,3526 v1(4582,4442) 4585,4599 4643,4657 v7@4911,4657
  other v1: 4583,3522
  other v7: 4911,4658
"VBAT +300": C2.2 C5.1 L1.2 R3.2 U2.9 U2.20 | length 3046.6
  Top Layer w10: R3.2@3745,3774.53 3745,3780.95 3791.41,3827.36 ; 3793.84,3829.84 3813,3849 3981,3849 4032,3798 v1@4032,3737 ; v1@4153,3400 4157.76,3396.2 4163,3392 v1@4215,3392 ; v1(4235,3670) 4235,3682 4265,3712 4307,3712 4350,3669 v1@4350,3535 ; C2.2@4399,3213 4399.25,3213.25 L1.2@4535,3213.25 ; L1.2@4581,3215.69 L1.2@4611.31,3215.69 ; L1.2@4611.63,3216 4631,3216 4671,3176 U2.20@4698.32,3176 ; U2.9@4863.68,3136.32 4890.68,3136.32 v1(4921,3106) ; C5.1@4942.56,3315 4951.56,3306 4975,3306 v1@5001,3332
  Top Layer w25: L1.2@4521,3214.25 v1(4521,3276)
  Bottom Layer w8: 4398,3224 4450,3276 v1(4521,3276)
  Bottom Layer w10: v1(4033,3725) 4069,3725 4083,3739 4166,3739 v1(4235,3670) ; v1@4162,3395 4157,3400 4157,3441 4196,3480 4297,3480 v1(4349,3532) ; v1@4220,3391 4220,3356 4258,3318 4258,3261 4295,3224 4398,3224
  Bottom Layer w25: v1(4521,3276) 4521,3316 4591,3386 4951,3386 5001,3336 5001,3146 4961,3106 v1(4921,3106)
  other v1: 5003.44,3328.44 4223,3392 4156,3394
VBAT_SENSE: R3.1 R19.2 U1.16 | length 203.6
  Top Layer w8: R3.1@3748,3714 3818.37,3714 3897.1,3635.27 U1.16@3897.1,3613.43
VDDA: C16.2 C18.2 L3.1 U8.5 U8.15 U8.16 U9.14 | length 1405.4
  Top Layer w8: 2878,3254.61 U8.16@2934.26,3254.61 3075.35,3254.61 ; U8.15@2934.26,3280.2 2898.2,3280.2 2878,3260 2878,2996 2978,2896 C18.2@3013.68,2896 ; C18.2@3015,2890 3015,2831 3025,2821 3168.37,2821 3182,2834.63 3182,2893 3170,2905 3170,2987 3255,3072 3255,3102.37 3256.31,3103.69 C16.2@3289,3103.69 3288,3104.68 3288,3153 L3.1@3290,3155 ; U9.14@3161.1,3035.32 3182.68,3035.32 3218,3000
pads on no net: J1.c1 J1.c2 J2.10 M1.NC M2.NC SW1.1 SW1.4 U1.4 U1.17 U1.20 U1.31 U1.33 U2.18 U5.8 U5.9 U8.4 U8.6 U8.7 U9.3 U9.7 U9.8 U9.9 U9.11 U9.13 U9.15 U9.16 U10.4 U11.4 U12.4 U13.4 U14.4 U15.4 U16.4 U17.4
copper on no net: | length 14570.9
  Top Layer w8: 3091.74,3254.61 3092.13,3255 ; 3976,3611 3976,3613.43
  Top Layer w10: 2149,3331.01 ccw(c4000,4000) 5851,3331.01 5323,3331 cw(c5323,3394) 5260,3394 5260,4606 cw(c5323,4606) 5323,4669 5851,4669 ccw(c4000,4000) 2149,4669 2677,4669 cw(c2677,4606) 2740,4606 2740,3394 cw(c2677,3394) 2677,3331 2149,3331
  other v2: 3918.76,3467.76 3966,3467.76 4013.24,3467.76 3918.76,3515 3966,3515 4013.24,3515 3918.76,3562.24 3966,3562.24 4013.24,3562.24
  other v4: 3255,3492 4745,3492 2907,3646 5093,3646 2907,4354 5093,4354 3255,4508 4745,4508
  other v5: 5082.93,3644.57 2922.07,3647.43 5082.93,4352.57 2922.07,4355.43
  other v6: 3550,2740 4450,2740
  other v8: 4000,2740

## Polygon pours and split planes (outlines as drawn)
GND on Bottom Layer "Bottom Layer-gnd" (solid, pour order 1000): 3079,3541 2844,3542 2761,3455 2759,3330 2689,3260 2688.1,3023.63 2877,2829 3206,2830 3405,3027 3405,3216
GND on Bottom Layer "MotorGnd" (solid, pour order 1000): 2933,5072 2934,5073 3321,5073 3321,4665 3118,4462 2859,4462 2859,5000
GND on Bottom Layer "Bottom Layer-gnd" (solid, pour order 1000): 4320,3413 5068,3413 5234,3249 5234,3055 5023,2806 4648,2673 4320,2670

## Keep-outs
Mechanical 1:
  circle w5: c3255,4508 r125
  circle w5: c4745,4508 r125
  circle w5: c4745,3492 r125
  circle w5: c3255,3492 r125

## Other copper
Top Layer:
  region net MOT1_CUR: 2972,4750 3006,4784 2999,4788 2938,4758
  region net MOT0_CUR: 3107,4752 3078,4782 3085,4786 3142,4758 3114,4755
  region net "VBAT +300": 4673,3181 4633,3221 4618,3221 4618,3185 4643,3185 4668,3172
  region net NetL1_1: 4670,3133 4667,3140 4642,3125 4618,3125 4618,3102 4639,3103
  region net NetL2_1: 4877,3093 4910,3049 4920,3050 4918,3070 4883,3100
  region net "VBAT +300": 4885,3134 4909,3099 4931,3098 4929,3122 4891,3141
  region net NetL2_2: 4889,3180 4913,3215 4935,3216 4933,3192 4890,3171
  region net VBAT: 4681,3195 4716,3195 4716,3219 4681,3217.97
  region net 3.3V: 4884,3156 4916.66,3168 4925.66,3168 4925.66,3144 4919,3144
  region net 5VUSB: 4689.32,3156 4643,3168 4626,3168 4626,3144 4644,3144
  region net MOT1_A: 2929,4817 2934,4821 2945,4842 2945,4852 2937,4852 2912,4835
  region net MOT_0A: 3153,4817 3148,4821 3137,4842 3137,4852 3145,4852 3170,4835
  region net MOT_0B: 3069,4747 3057,4774 3066,4779 3093,4753 3093,4747
  region net MOT1_B: 3013,4746 3025,4773 3016,4778 2989,4752 2989,4746

## Silkscreen, mask and mechanical layers (free items; w line width, h text height)
Top Overlay:
  circle w10: c4452,3760 r50
  circle w10: c3564,3753 r50
  region: 2458,4204 2308,4054 2408,4054 2408,3854 2508,3854 2508,4054 2608,4054
  text "+" at 4434,3736 h60
  text "+" at 3543,3724 h60
  text "Motor" at 3589,3074 h80
  text "Driver" at 3590,2939 h80
Mechanical 1:
  circle w1: c4000,4000 r1550
  lines w3: 2059,4000 5896,4000 ; 4000,2000 4000,6000

## Text inside footprints (layer, text, board x,y; h text height)
J2: Top Overlay "10" at 2663.16,2843.7 h50 r135; Top Overlay "9" at 2733.87,2914.41 h50 r135; Top Overlay "1" at 3115.71,2532.57 h50 r135; Top Overlay "2" at 3059.14,2447.72 h50 r135